# Altium PCB vlc_ctrl.PcbDoc
Units mil, origin at the board's own origin, x right, y up, seen from the top; angles counter-clockwise.
Board outline 750 x 600 mil, 2 copper layers (Top Layer, Bottom Layer); 18 components, 12 nets, 47 pads, 0 vias.
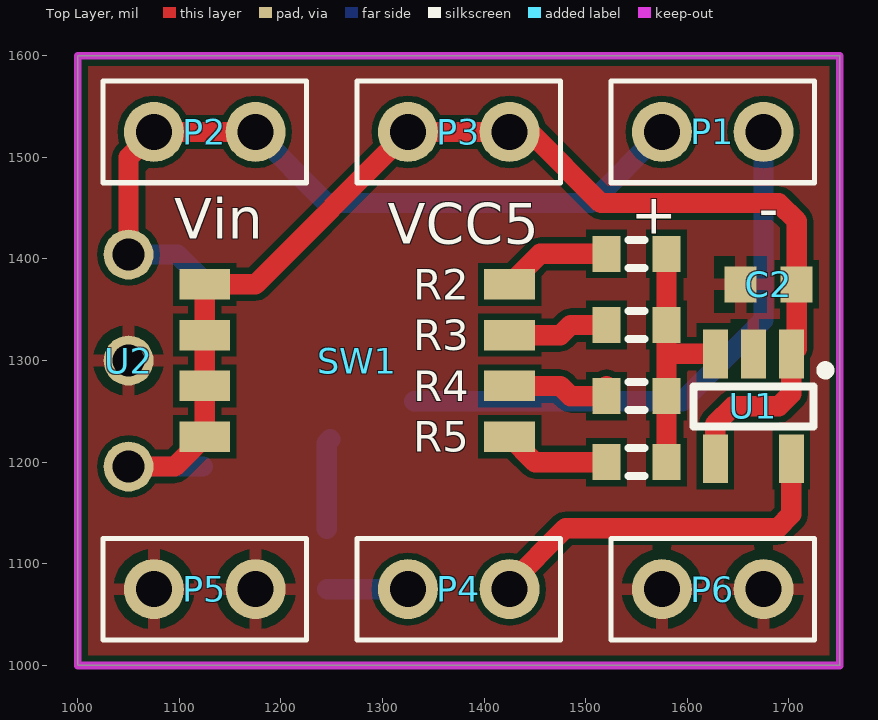
[diagram p0: Top Layer view]
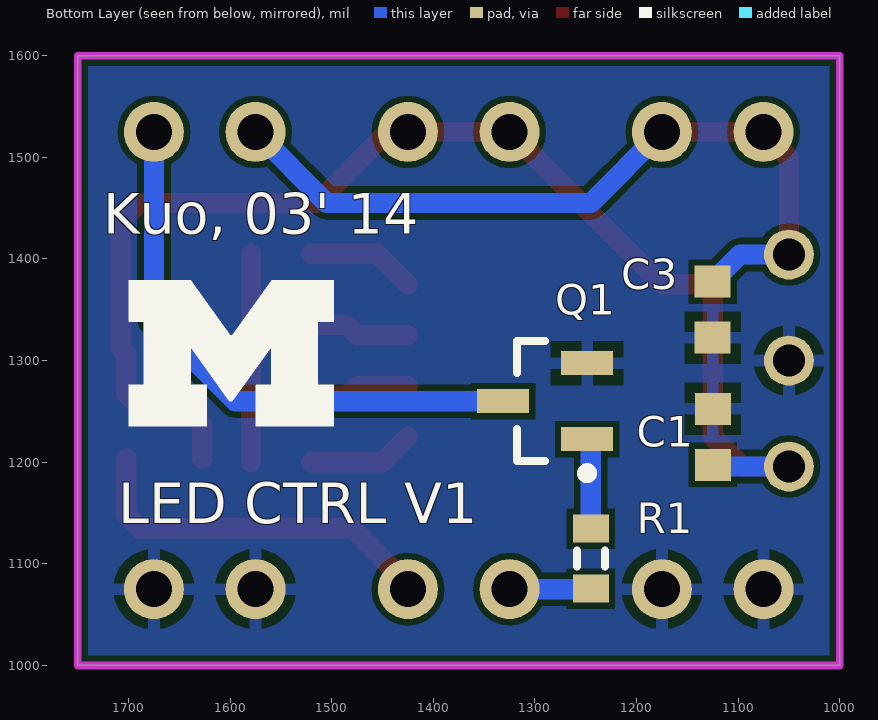
[diagram p1: Bottom Layer view, seen from below]

## Layer stack, top to bottom
Top Solder: solder mask 0.4, Solder Resist, Dk 3.5
Top Layer: signal copper 1.4
Dielectric 1: dielectric 12.6, FR-4, Dk 4.8
Bottom Layer: signal copper 1.4
Bottom Solder: solder mask 0.4, Solder Resist, Dk 3.5

## Board outline
1000,1000 1000,1600 1750,1600 1750,1000

## Design rules (kind name [scope] priority, off if disabled: settings)
Clearance "Clearance~Sunstone Circuits" [All] p1: gap=6 // Sunstone Circuits Minimum Clearance Rule (Double Sided)
HoleSize "HoleSize~Sunstone Circuits" [All] p1: absolutevalues=TRUE maxlimit=251 minlimit=16 maxpercent=80.000 minpercent=20.000 // SSC Hole Size Rule For Single Sided & Double Sided Designs.
HoleSize Testpoint [All] p2: absolutevalues=TRUE maxlimit=100 minlimit=1 maxpercent=80.000 minpercent=20.000
HoleSize TestPointUsage [All] p3: absolutevalues=TRUE maxlimit=100 minlimit=1 maxpercent=80.000 minpercent=20.000
MinimumAnnularRing "MinimumAnnularRing~Sunstone Circuits" [All] p1: minimumring=7 // Sunstone Circuits Minimum Annular Ring (Double Sided)
PlaneClearance "PlaneClearance~Sunstone Circuits" [All] p1: clearance=12 // Sunstone Circuits Power Plane Clearance Rule (Double Sided)
PlaneConnect "PlaneConnect~Sunstone Circuits" [All] p1: planeconnectstyle=Relief reliefexpansion=10 reliefentries=4 reliefconductorwidth=8 reliefairgap=10 // Sunstone Circuits Power Plane Connect Rule (Double Sided)
PolygonConnect "PolygonConnect~Sunstone Circuits" [All] p1: connectstyle=Relief reliefconductorwidth=12 reliefentries=4 polygonreliefangle="90 Angle" airgapwidth=10 // Sunstone Circuits Polygon Connect Style (Double Sided)
RoomDefinition vlc_ctrl [InComponentClass('vlc_ctrl')] p1: confinementstyle=ConfineIn formatcopy=TRUE lockcomponents=FALSE outline 1012.5,1012.5 1012.5,1587.5 1737.5,1587.5 1737.5,1453.62 1744.21,1453.62 1744.21,1388.59 1764.8,1388.59 1764.8,1211.41 1737.5,1211.41 1737.5,1012.5
RoutingVias "RoutingVias~Sunstone Circuits" [All] p1: holewidth=16 width=30 viastyle="Through Hole" minholewidth=16 minwidth=30 maxholewidth=20 maxwidth=40 // Sunstone Circuits Routing Vias Rule (Double Sided)
ShortCircuit "ShortCircuit~Sunstone Circuits" [All] p1: allowed=FALSE // Sunstone Circuits Short Circuit Rule~Do Not Allow (Double Sided)
SolderMaskExpansion "SolderMaskExpansion~Sunstone Circuits" [All] p1: expansion=3 // Sunstone Circuits Solder Mask Expansion Rule (Double Sided)
ViasUnderSMD "ViasUnderSMD~Sunstone Circuits" [All] p1: allowed=FALSE // Sunstone Circuits Vias Under SMD~Do Not Allow (Double Sided)
Width "Width~Sunstone Circuits" [All] p1: maxlimit=100 minlimit=6 preferedwidth=10 // Sunstone Circuits Minimum Width Rule (Double Sided)
25 further rules are at their usual default settings.

## Components (designator, comment, footprint, x,y, rotation, side; value= is the part's Value field where it differs from the comment)
C1 "Cap Semi" 1608[0603] 1125,1225 r270 bottom
C2 "Cap Semi" 1608[0603] 1680,1375 r0 top
C3 "Cap Semi" 1608[0603] 1125,1350 r90 bottom
P1 "1 x 2 header" "1x2 header" 1625,1525 r180 top
P2 "1 x 2 header" "1x2 header" 1125,1525 r180 top
P3 "1 x 2 header" "1x2 header" 1375,1525 r180 top
P4 "1 x 2 header" "1x2 header" 1375,1075 r180 top
P5 "1 x 2 header" "1x2 header" 1125,1075 r180 top
P6 "1 x 2 header" "1x2 header" 1625,1075 r180 top
Q1 "Si2312CDS" SOT95P250-3N 1290,1260 r0 bottom
R1 "Res3" J1-0603 1245,1105 r270 bottom
R2 "Res3" J1-0603 1550,1405 r180 top
R3 "Res3" J1-0603 1550,1335 r180 top
R4 "Res3" J1-0603 1550,1265 r180 top
R5 "Res3" J1-0603 1550,1200 r180 top
SW1 "CHS-04TB" CHS04TB 1275,1300 r270 top
U1 "LTC6900" TSOT23 1665,1255 r180 top
U2 "LM78L05" TO92 1050,1300 r90 top

## Footprints (in the part's own frame and the unit in brackets; to place one, negate y for a bottom-side part, rotate by r counter-clockwise, add the part's x,y. Pads: shape width x height; smd on the part's side, far side on the other; paste and mask are expansions set on the pad)
"1x2 header" [mm] "1x2 header, 100 mils"
  round 1.5 hole 0.9: 1(-1.27,0) 2(1.27,0)
  silkscreen extent -2.54,-1.27 2.54,1.27, body extent -2.53,-1.26 2.53,1.26, height 8.38
1608[0603] [mm] "Chip Capacitor, Body 1.6x0.8mm, IPC High Density"
  rect 0.8x0.9 smd: 1(-0.7,0) 2(0.7,0)
  body extent -0.87,-0.48 0.87,0.48, height 1.3
CHS04TB [mm] "4 POS DIP SWITCH"
  rect 0.76x1.27 smd: 1(-1.905,-3.81) 2(-1.905,3.81) 3(-0.635,-3.81) 4(-0.635,3.81) 5(0.635,-3.81) 6(0.635,3.81) 7(1.905,-3.81) 8(1.905,3.81)
J1-0603 [mm] "Chip Resistor, Body 1.6x0.8mm, IPC High Density"
  rect 0.7x0.9 smd: 1(-0.75,0) 2(0.75,0)
  silkscreen extent -0.2,-0.35 0.2,0.35, body extent -0.85,-0.48 0.85,0.48, height 0.9
SOT95P250-3N [mm] "SOT23, 3-Leads, Body 2.9x1.3mm, Pitch 0.95mm, Lead Span 2.3mm, IPC Medium Density"
  rect 1.3x0.6 smd: 1(-1.05,0.95) 2(-1.05,-0.95) 3(1.05,0)
  silkscreen extent -1.17,-1.5 0.7,1.92, body extent -0.7,-1.5 0.7,1.5, height 1.2
TO92 [mm]
  round 1.25 hole 0.8: 1(-2.65,0) 2(0,0) 3(2.65,0)
TSOT23 [mm]
  rect 0.62x1.22 smd: 1(-0.95,-1.31) 2(0,-1.31) 3(0.95,-1.31) 4(0.95,1.31) 5(-0.95,1.31)
  silkscreen extent -1.9,-1 1.5,0.5

## Part data
C1 C2 C3: "Capacitor (Semiconductor SIM Model)"
P1 P2 P3 P4 P5 P6: "100 mils standard header"
Q1: "N-Channel 20 V (D-S) MOSFET"
R1 R2 R3 R4 R5: "Resistor"
SW1: "SLIDE SWITCHES"
U1: "Low Power, 1kHz to 20MHz   Resistor Set SOT-23 Oscillator"
U2: "LM78LXX Series 3-Terminal Positive Regulators"

## Nets (pads, with @x,y where several pads share a name; then routed paths per layer and width w, separated by ;. In a path a pad name is that pad's centre, name@x,y a point inside that pad or via, vN(x,y) a via of type N, cw(c..) or ccw(c..) an arc to the next point about the centre after c; other vN are vias at no path point)
GND: C1.1 C2.1 C3.1 P5.1 P5.2 P6.1 P6.2 Q1.2 U1.2 U2.2
NetP1_1: P1.1 Q1.3 | length 561.8
  Bottom Layer w20: Q1.3 1595,1260 1675,1340 P1.1
NetP4_1: P4.1 U1.5 | length 365.7
  Top Layer w20: P4.1 1425,1080 1480,1135 1688.83,1135 1702.4,1148.57 U1.5
NetP4_2: P4.2 R1.2 | length 79.5
  Bottom Layer w20: R1.2@1245.47,1075 P4.2
NetQ1_1: Q1.1 R1.1 | length 89.6
  Bottom Layer w20: R1.1 1245,1218.94 Q1.1
NetR2_1: R2.1 R3.1 R4.1 R5.1 U1.3 | length 246.8
  Top Layer w20: R5.1 R4.1 1579.53,1300 ; R2.1 R3.1 1579.53,1300 ; 1579.84,1300 1579.53,1300 ; 1586.1,1306.57 U1.3
NetR2_2: R2.2 SW1.2 | length 107.9
  Top Layer w20: SW1.2 1455,1405 R2.2
NetR3_2: R3.2 SW1.4 | length 99.6
  Top Layer w20: SW1.4 1475,1325 1485,1335 R3.2
NetR4_2: R4.2 SW1.6 | length 99.6
  Top Layer w20: SW1.6 1475,1275 1485,1265 R4.2
NetR5_2: R5.2 SW1.8 | length 105.8
  Top Layer w20: SW1.8 1450,1200 R5.2
VCC5: C1.2 C2.2 P3.1 P3.2 SW1.1 SW1.3 SW1.5 SW1.7 U1.1 U1.4 U2.1 | length 1284.8
  Top Layer w20: U2.1 1095.67,1195.67 SW1.7 SW1.5 SW1.3 SW1.1 1175,1375 P3.2 P3.1 1445,1525 1515,1455 1690,1455 1707.56,1437.44 C2.2 1707.56,1311.73 U1.1 1702.4,1267.4 1690,1255 1645,1255 1627.6,1237.6 U1.4
  Bottom Layer w20: U2.1 C1.2@1123.23,1195.67
VIN: C3.2 P1.2 P2.1 P2.2 U2.3 | length 775.1
  Top Layer w20: U2.3 1050,1500 P2.2 P2.1
  Bottom Layer w20: U2.3 1098.23,1404.33 C3.2 ; P2.1 1245,1455 1505,1455 P1.2

## Polygon pours and split planes (outlines as drawn)
GND on Top Layer "Bottom Layer-No Net" (solid, pour order 2): 1000,1600 1750,1600 1750,1000 1000,1000
GND on Bottom Layer "Bottom Layer-No Net" (solid, pour order 4): 1000,1600 1750,1600 1750,1000 1000,1000

## Keep-outs
Keep-Out Layer:
  the board outline again, w7.87

## Silkscreen, mask and mechanical layers (free items; w line width, h text height)
Top Overlay:
  text "-" at 1690,1430 h40
  text "+" at 1590,1425 h40
  text "Vin" at 1095,1420 h40
  text "VCC5" at 1305,1415 h40
Bottom Overlay:
  region: 1699.8,1235.27 1623.08,1235.27 1623.08,1276.24 1638.69,1276.24 1638.69,1313.3 1600.65,1259.98 1598.05,1259.98 1559.36,1313.3 1559.36,1276.24 1574.97,1276.24 1574.97,1235.27 1498.24,1235.27 1498.24,1276.24 1513.85,1276.24 1513.85,1338 1498.24,1338 1498.24,1378.97 1559.04,1378.97 1598.05,1325 1600,1325 1639.01,1378.97 1699.8,1378.97 1699.8,1338 1684.85,1338 1684.85,1276.24 1699.8,1276.24
  text "Kuo, 03' 14" at 1725,1425 h40
  text "LED CTRL V1" at 1710,1140 h40